# Altium PCB ESP32 with USBC V1I1.PcbDoc (part 2 of 3)
Units mil, origin at the board's own origin, x right, y up, seen from the top; angles counter-clockwise.
Board outline 2700 x 1000 mil, 4 copper layers (L1, L2, L3, L4), stack 61.583 mil thick; 64 components, 73 nets, 299 pads, 159 vias.
Unrouted connection lines stored in the file: 15.
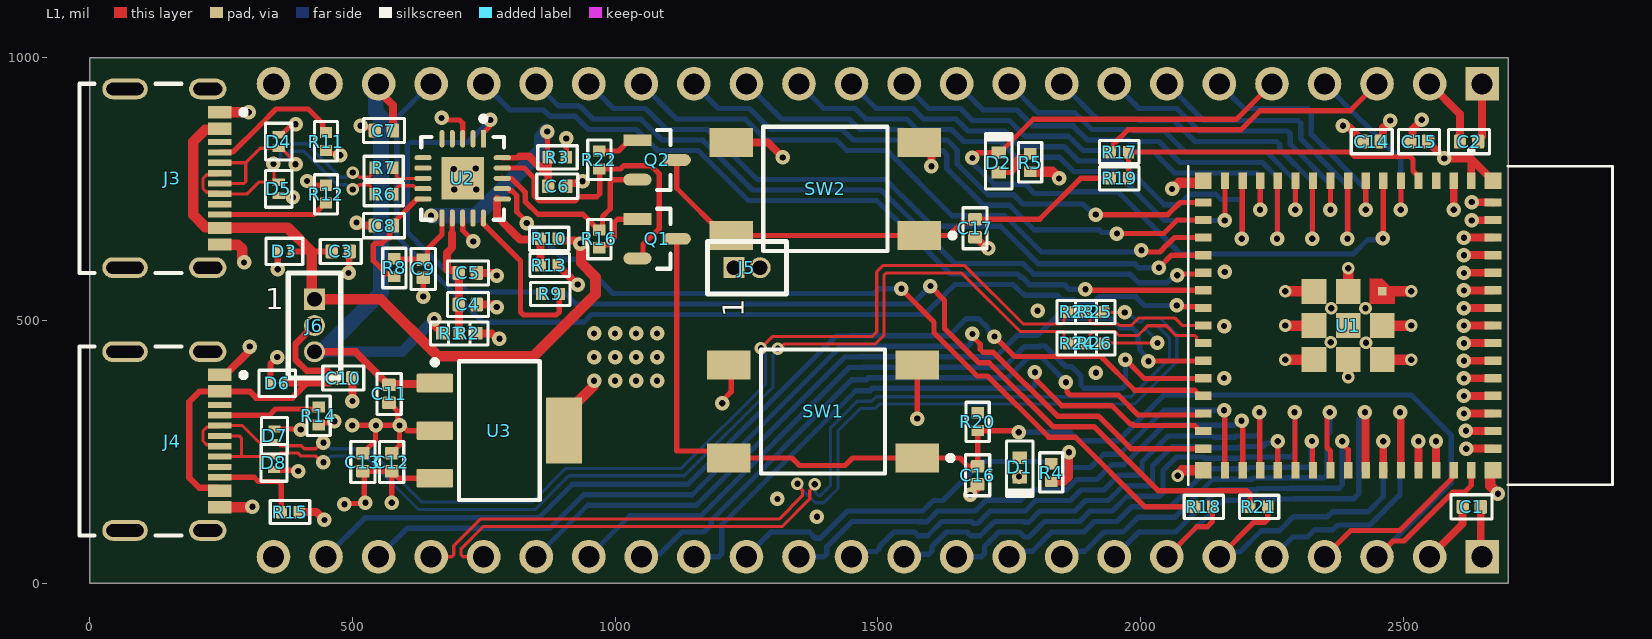
[diagram p0: L1 view]

## Part data (continued)
R4 R5: library part RC0402FR-071KL, "RES 1K OHM 1% 1/16W 0402", Case Code (Imperial)=0402, LCSC Part Number=C106235, Manufacturer="Yageo Group", Max Operating Temperature=155°C, Min Operating Temperature=-55°C, Power Dissipation=62.5mW, Power Rating=63mW, Supplier Part Number=311-1.00KLRCT-ND, Temperature Coefficient=100ppm/°C, Tolerance=1%, Voltage Rating=50V, Case Code (Metric)=0402, Case/Package=0402, Category="Chip SMD Resistors", China RoHS=Non-Compliant, ComponentLink1Description=https://datasheet.octopart.com:443/RC0402FR-071KL-Yageo-datasheet-175887523.pdf?src-supplier=IHS, ComponentLink1URL=https://datasheet.octopart.com:443/RC0402FR-071KL-Yageo-datasheet-175887523.pdf?src-supplier=IHS, ComponentLink2Description=https://datasheet.octopart.com:443/RC0402FR-071KL-Yageo-datasheet-164759695.pdf?src-supplier=Upverter, ComponentLink2URL=https://datasheet.octopart.com:443/RC0402FR-071KL-Yageo-datasheet-164759695.pdf?src-supplier=Upverter, ComponentLink3Description=https://datasheet.octopart.com:443/RC0402FR-071KL-Yageo-datasheet-103092701.pdf?src-supplier=Upverter, ComponentLink3URL=https://datasheet.octopart.com:443/RC0402FR-071KL-Yageo-datasheet-103092701.pdf?src-supplier=Upverter, ComponentLink4Description=https://sigma.octopart.com:443/138820526/technical_drawing/Yageo-RC0402FR-071KL.pdf?src-supplier=Upverter, ComponentLink4URL=https://sigma.octopart.com:443/138820526/technical_drawing/Yageo-RC0402FR-071KL.pdf?src-supplier=Upverter, ComponentLink5Description=https://datasheet.octopart.com:443/RC0402FR-071KL-Yageo-datasheet-98239111.pdf?src-supplier=Upverter, ComponentLink5URL=https://datasheet.octopart.com:443/RC0402FR-071KL-Yageo-datasheet-98239111.pdf?src-supplier=Upverter, ComponentLink6Description=https://datasheet.octopart.com:443/RC0402FR-071KL-Yageo-datasheet-10408619.pdf?src-supplier=Newark, ComponentLink6URL=https://datasheet.octopart.com:443/RC0402FR-071KL-Yageo-datasheet-10408619.pdf?src-supplier=Newark, ComponentLink7Description=https://datasheet.octopart.com:443/RC0402FR-071KL-Yageo-datasheet-8324527.pdf?src-supplier=Newark, ComponentLink7URL=https://datasheet.octopart.com:443/RC0402FR-071KL-Yageo-datasheet-8324527.pdf?src-supplier=Newark, ComponentLink8Description=https://datasheet.octopart.com:443/RC0402FR-071KL-Yageo-datasheet-62067350.pdf?src-supplier=Farnell, ComponentLink8URL=https://datasheet.octopart.com:443/RC0402FR-071KL-Yageo-datasheet-62067350.pdf?src-supplier=Farnell, ComponentLink9Description=https://datasheet.octopart.com:443/RC0402FR-071KL-Yageo-datasheet-12531192.pdf?src-supplier=Future+Electronics, ComponentLink9URL=https://datasheet.octopart.com:443/RC0402FR-071KL-Yageo-datasheet-12531192.pdf?src-supplier=Future+Electronics, ComponentLink10Description=https://datasheet.octopart.com:443/RC0402FR-071KL-Yageo-datasheet-137700087.pdf?src-supplier=Future+Electronics, ComponentLink10URL=https://datasheet.octopart.com:443/RC0402FR-071KL-Yageo-datasheet-137700087.pdf?src-supplier=Future+Electronics, ComponentLink11Description=https://datasheet.octopart.com:443/RC0402FR-071KL-Yageo-datasheet-8324255.pdf?src-supplier=Future+Electronics, ComponentLink11URL=https://datasheet.octopart.com:443/RC0402FR-071KL-Yageo-datasheet-8324255.pdf?src-supplier=Future+Electronics, ComponentLink12Description=https://datasheet.octopart.com:443/RC0402FR-071KL-Yageo-datasheet-8329306.pdf?src-supplier=element14, ComponentLink12URL=https://datasheet.octopart.com:443/RC0402FR-071KL-Yageo-datasheet-8329306.pdf?src-supplier=element14, ComponentLink13Description=https://datasheet.octopart.com:443/RC0402FR-071KL-Yageo-datasheet-505231.pdf?src-supplier=element14, ComponentLink13URL=https://datasheet.octopart.com:443/RC0402FR-071KL-Yageo-datasheet-505231.pdf?src-supplier=element14, ComponentLink14Description=https://datasheet.octopart.com:443/RC0402FR-071KL-Yageo-datasheet-175423674.pdf?src-supplier=SOS+electronic, ComponentLink14URL=https://datasheet.octopart.com:443/RC0402FR-071KL-Yageo-datasheet-175423674.pdf?src-supplier=SOS+electronic, ComponentLink15Description=https://datasheet.octopart.com:443/RC0402FR-071KL-Yageo-datasheet-148775077.pdf?src-supplier=TME, ComponentLink15URL=https://datasheet.octopart.com:443/RC0402FR-071KL-Yageo-datasheet-148775077.pdf?src-supplier=TME, ComponentLink16Description=https://datasheet.octopart.com:443/RC0402FR-071KL-Yageo-datasheet-79472498.pdf?src-supplier=Megastar, ComponentLink16URL=https://datasheet.octopart.com:443/RC0402FR-071KL-Yageo-datasheet-79472498.pdf?src-supplier=Megastar, ComponentLink17Description=https://datasheet.octopart.com/RC0402FR-071KL-Yageo-datasheet-73766026.pdf, ComponentLink17URL=https://datasheet.octopart.com/RC0402FR-071KL-Yageo-datasheet-73766026.pdf, ComponentLink18Description=http://sigma.octopart.com:80/conflict_mineral_statement/Yageo-company-3.pdf?src-supplier=Compliance+Statements, ComponentLink18URL=http://sigma.octopart.com:80/conflict_mineral_statement/Yageo-company-3.pdf?src-supplier=Compliance+Statements, ComponentLink19Description=http://sigma.octopart.com:80/rohs_statement/Yageo-company-2.pdf?src-supplier=Compliance+Statements, ComponentLink19URL=http://sigma.octopart.com:80/rohs_statement/Yageo-company-2.pdf?src-supplier=Compliance+Statements, Composition="Thick Film", Depth=500µm, Height=350µm, Lead Free="Lead Free", Length=1mm, Lifecycle Status=Production, Manufacturer Part Number=RC0402FR-071KL, Military Standard=Not, Mounting Technology="Surface Mount", Number of Terminals=2, Packaging="Tape & Reel", Pins=2, Pricing="1=0.1, 10=0.007, 25=0.0068, 50=0.0062, 100=0.0056, 250=0.00308 (USD)", REACH SVHC=Yes, RoHS=Compliant, Schedule B="8533210045, 8533210045|8533210045|8533210045|8533210045|8533210045|8533210045|8533210045|8533210045|8533210045|8533210045|8533210045|8533210045|8533210045|8533210045|8533210045|8533210045|8533210045|8533210045|8533210045|8533210045|8533210045|8533210045|8533210045|85", Stock=2177165, Supplier=DigiKey, Termination=SMD/SMT, Voltage Rating (AC)=50V, Voltage Rating (DC)=50V, Width=500µm, Working Voltage=50V
R6 R7 R17 R19: library part RC0402FR-0727RL, "RES 27 OHM 1% 1/16W 0402", Case Code (Imperial)=0402, Case Code (Metric)=1005, LCSC Part Number=C138021, Manufacturer="Yageo Group", Max Operating Temperature=155°C, Max Power Dissipation=63mW, Min Operating Temperature=-55°C, Power Dissipation=62.5mW, Supplier Part Number=YAG3086CT-ND, Temperature Coefficient=100ppm/°C, Tolerance=1%, Voltage Rating=50V, Case/Package=0402, Category="Chip SMD Resistors", China RoHS=Non-Compliant, ComponentLink1Description=https://datasheet.octopart.com:443/RC0402FR-0727RL-Yageo-datasheet-175887523.pdf?src-supplier=Newark, ComponentLink1URL=https://datasheet.octopart.com:443/RC0402FR-0727RL-Yageo-datasheet-175887523.pdf?src-supplier=Newark, ComponentLink2Description=https://datasheet.octopart.com:443/RC0402FR-0727RL-Yageo-datasheet-8324527.pdf?src-supplier=Newark, ComponentLink2URL=https://datasheet.octopart.com:443/RC0402FR-0727RL-Yageo-datasheet-8324527.pdf?src-supplier=Newark, ComponentLink3Description=https://datasheet.octopart.com:443/RC0402FR-0727RL-Yageo-datasheet-103092701.pdf?src-supplier=Upverter, ComponentLink3URL=https://datasheet.octopart.com:443/RC0402FR-0727RL-Yageo-datasheet-103092701.pdf?src-supplier=Upverter, ComponentLink4Description=https://datasheet.octopart.com:443/RC0402FR-0727RL-Yageo-datasheet-10408619.pdf?src-supplier=element14+APAC, ComponentLink4URL=https://datasheet.octopart.com:443/RC0402FR-0727RL-Yageo-datasheet-10408619.pdf?src-supplier=element14+APAC, ComponentLink5Description=https://datasheet.octopart.com:443/RC0402FR-0727RL-Yageo-datasheet-62067350.pdf?src-supplier=element14+APAC, ComponentLink5URL=https://datasheet.octopart.com:443/RC0402FR-0727RL-Yageo-datasheet-62067350.pdf?src-supplier=element14+APAC, ComponentLink6Description=https://datasheet.octopart.com:443/RC0402FR-0727RL-Yageo-datasheet-175423674.pdf?src-supplier=SOS+electronic, ComponentLink6URL=https://datasheet.octopart.com:443/RC0402FR-0727RL-Yageo-datasheet-175423674.pdf?src-supplier=SOS+electronic, ComponentLink7Description=https://datasheet.octopart.com:443/RC0402FR-0727RL-Yageo-datasheet-8329306.pdf?src-supplier=SOS+electronic, ComponentLink7URL=https://datasheet.octopart.com:443/RC0402FR-0727RL-Yageo-datasheet-8329306.pdf?src-supplier=SOS+electronic, ComponentLink8Description=https://datasheet.octopart.com:443/RC0402FR-0727RL-Yageo-datasheet-164759695.pdf?src-supplier=Future+Electronics, ComponentLink8URL=https://datasheet.octopart.com:443/RC0402FR-0727RL-Yageo-datasheet-164759695.pdf?src-supplier=Future+Electronics, ComponentLink9Description=https://datasheet.octopart.com:443/RC0402FR-0727RL-Yageo-datasheet-137700087.pdf?src-supplier=Future+Electronics, ComponentLink9URL=https://datasheet.octopart.com:443/RC0402FR-0727RL-Yageo-datasheet-137700087.pdf?src-supplier=Future+Electronics, ComponentLink10Description=https://datasheet.octopart.com:443/RC0402FR-0727RL-Yageo-datasheet-12531192.pdf?src-supplier=Future+Electronics, ComponentLink10URL=https://datasheet.octopart.com:443/RC0402FR-0727RL-Yageo-datasheet-12531192.pdf?src-supplier=Future+Electronics, ComponentLink11Description=https://datasheet.octopart.com:443/RC0402FR-0727RL-Yageo-datasheet-148775077.pdf?src-supplier=TME, ComponentLink11URL=https://datasheet.octopart.com:443/RC0402FR-0727RL-Yageo-datasheet-148775077.pdf?src-supplier=TME, ComponentLink12Description=https://datasheet.octopart.com/RC0402FR-0727RL-Yageo-datasheet-73766026.pdf, ComponentLink12URL=https://datasheet.octopart.com/RC0402FR-0727RL-Yageo-datasheet-73766026.pdf, ComponentLink13Description=http://sigma.octopart.com:80/conflict_mineral_statement/Yageo-company-3.pdf?src-supplier=Compliance+Statements, ComponentLink13URL=http://sigma.octopart.com:80/conflict_mineral_statement/Yageo-company-3.pdf?src-supplier=Compliance+Statements, ComponentLink14Description=http://sigma.octopart.com:80/rohs_statement/Yageo-company-2.pdf?src-supplier=Compliance+Statements, ComponentLink14URL=http://sigma.octopart.com:80/rohs_statement/Yageo-company-2.pdf?src-supplier=Compliance+Statements, Composition="Thick Film", Depth=500µm, Features="Moisture Resistant", Height=350µm, Lead Free="Lead Free", Length=1mm, Lifecycle Status=Production, Manufacturer Part Number=RC0402FR-0727RL, Military Standard=Not, Mounting Technology="Surface Mount", Number of Terminals=2, Number of Terminations=2, Pins=2, Power Rating=63mW, Pricing="1=0.1, 10=0.007, 25=0.0068, 50=0.0062, 100=0.0051, 250=0.00308 (USD)", REACH SVHC=Yes, RoHS=Compliant, Schedule B="8533210045, 8533210045|8533210045, 8533210045|8533210045|8533210045, 8533210045|8533210045|8533210045|8533210045", Stock=411299, Supplier=DigiKey, Termination=SMD/SMT, Voltage Rating (AC)=50V, Voltage Rating (DC)=50V, Weight=652.039032µg, Width=500µm, Working Voltage=50V
R9 R13 R16 R20 R22: library part AC0402FR-0710KL, "RES SMD 10K OHM 1% 1/16W 0402", Case Code (Imperial)=0402, Case Code (Metric)=1005, LCSC Part Number=C144807, Manufacturer="Yageo Group", Max Operating Temperature=155°C, Max Power Dissipation=63mW, Min Operating Temperature=-55°C, Power Dissipation=62.5mW, Supplier Part Number=YAG3436CT-ND, Temperature Coefficient=100ppm/°C, Tolerance=1%, Voltage Rating=50V, Case/Package=0402, Category="Chip SMD Resistors", China RoHS=Non-Compliant, ComponentLink1Description=https://datasheet.octopart.com:443/AC0402FR-0710KL-Yageo-datasheet-182189377.pdf?src-supplier=IHS, ComponentLink1URL=https://datasheet.octopart.com:443/AC0402FR-0710KL-Yageo-datasheet-182189377.pdf?src-supplier=IHS, ComponentLink2Description=https://datasheet.octopart.com:443/AC0402FR-0710KL-Yageo-datasheet-83209224.pdf?src-supplier=Upverter, ComponentLink2URL=https://datasheet.octopart.com:443/AC0402FR-0710KL-Yageo-datasheet-83209224.pdf?src-supplier=Upverter, ComponentLink3Description=https://datasheet.octopart.com:443/AC0402FR-0710KL-Yageo-datasheet-178509465.pdf?src-supplier=Newark, ComponentLink3URL=https://datasheet.octopart.com:443/AC0402FR-0710KL-Yageo-datasheet-178509465.pdf?src-supplier=Newark, ComponentLink4Description=https://datasheet.octopart.com:443/AC0402FR-0710KL-Yageo-datasheet-166720450.pdf?src-supplier=JRH+Electronics, ComponentLink4URL=https://datasheet.octopart.com:443/AC0402FR-0710KL-Yageo-datasheet-166720450.pdf?src-supplier=JRH+Electronics, ComponentLink5Description=https://datasheet.octopart.com:443/AC0402FR-0710KL-Yageo-datasheet-151884373.pdf?src-supplier=Future+Electronics, ComponentLink5URL=https://datasheet.octopart.com:443/AC0402FR-0710KL-Yageo-datasheet-151884373.pdf?src-supplier=Future+Electronics, ComponentLink6Description=https://datasheet.octopart.com:443/AC0402FR-0710KL-Yageo-datasheet-137699919.pdf?src-supplier=Future+Electronics, ComponentLink6URL=https://datasheet.octopart.com:443/AC0402FR-0710KL-Yageo-datasheet-137699919.pdf?src-supplier=Future+Electronics, ComponentLink7Description=https://datasheet.octopart.com:443/AC0402FR-0710KL-Yageo-datasheet-24580492.pdf?src-supplier=Future+Electronics, ComponentLink7URL=https://datasheet.octopart.com:443/AC0402FR-0710KL-Yageo-datasheet-24580492.pdf?src-supplier=Future+Electronics, ComponentLink8Description=https://datasheet.octopart.com:443/AC0402FR-0710KL-Yageo-datasheet-13029202.pdf?src-supplier=Future+Electronics, ComponentLink8URL=https://datasheet.octopart.com:443/AC0402FR-0710KL-Yageo-datasheet-13029202.pdf?src-supplier=Future+Electronics, ComponentLink9Description=https://datasheet.octopart.com/AC0402FR-0710KL-Yageo-datasheet-12512238.pdf, ComponentLink9URL=https://datasheet.octopart.com/AC0402FR-0710KL-Yageo-datasheet-12512238.pdf, ComponentLink10Description=https://datasheet.octopart.com:443/AC0402FR-0710KL-Yageo-Group-datasheet-164768995.pdf?src-supplier=ODG+(Origin+Data+Global), ComponentLink10URL=https://datasheet.octopart.com:443/AC0402FR-0710KL-Yageo-Group-datasheet-164768995.pdf?src-supplier=ODG+(Origin+Data+Global), ComponentLink11Description=https://datasheet.octopart.com:443/AC0402FR-0710KL-Yageo-datasheet-128677448.pdf?src-supplier=X-ON, ComponentLink11URL=https://datasheet.octopart.com:443/AC0402FR-0710KL-Yageo-datasheet-128677448.pdf?src-supplier=X-ON, ComponentLink12Description=http://sigma.octopart.com:80/conflict_mineral_statement/Yageo-company-3.pdf?src-supplier=Compliance+Statements, ComponentLink12URL=http://sigma.octopart.com:80/conflict_mineral_statement/Yageo-company-3.pdf?src-supplier=Compliance+Statements, ComponentLink13Description=http://sigma.octopart.com:80/rohs_statement/Yageo-company-2.pdf?src-supplier=Compliance+Statements, ComponentLink13URL=http://sigma.octopart.com:80/rohs_statement/Yageo-company-2.pdf?src-supplier=Compliance+Statements, Composition="Thick Film", Depth=500µm, Features="Automotive AEC-Q200, Moisture Resistant", Height=320µm, Lead Free="Lead Free", Length=990.6µm, Lifecycle Status=Production, Manufacturer Part Number=AC0402FR-0710KL, Military Standard=Not, Mounting Technology="Surface Mount", Number of Terminals=2, Number of Terminations=2, Packaging="Tape & Reel", Power Rating=62.5mW, Pricing="1=0.11, 10=0.008, 25=0.0076, 50=0.0068, 100=0.0058, 5000=0.00407 (USD)", REACH SVHC=Yes, RoHS=Compliant, Schedule B="8533210045, 8533210045|8533210045|8533210045|8533210045|8533210045|8533210045|8533210045|8533210045|8533210045|8533210045|8533210045|8533210045|8533210045|8533210045|8533210045|8533210045|8533210045|8533210045|8533210045, 8533210045|8533210045|8533210045|8533210045|8533210045|8533210045|8533210045|8533210045|8533210045|8533210045|8533210045|8533210045|8533210045|8533210045|8533210045|8533210045|8533210045|8533210045|8533210045|8533210045|8533210045|8533210045|8533210045|85", Stock=3640210, Supplier=DigiKey, Termination=SMD/SMT, Width=500µm, Working Voltage=50V
R10: library part RC0402FR-074K7L, "RES 4.7K OHM 1% 1/16W 0402", Case Code (Imperial)=0402, Case Code (Metric)=1005, LCSC Part Number=C105871, Manufacturer="Yageo Group", Max Operating Temperature=155°C, Min Operating Temperature=-55°C, Power Dissipation=62.5mW, Power Rating=63mW, Supplier Part Number=311-4.7KLRDKR-ND, Temperature Coefficient=100ppm/°C, Tolerance=1%, Voltage Rating=50V, Case/Package=0402, Category="Chip SMD Resistors", China RoHS=Non-Compliant, ComponentLink1Description=https://datasheet.octopart.com:443/RC0402FR-074K7L-Yageo-datasheet-175887523.pdf?src-supplier=IHS, ComponentLink1URL=https://datasheet.octopart.com:443/RC0402FR-074K7L-Yageo-datasheet-175887523.pdf?src-supplier=IHS, ComponentLink2Description=https://datasheet.octopart.com:443/RC0402FR-074K7L-Yageo-datasheet-103092701.pdf?src-supplier=Upverter, ComponentLink2URL=https://datasheet.octopart.com:443/RC0402FR-074K7L-Yageo-datasheet-103092701.pdf?src-supplier=Upverter, ComponentLink3Description=https://datasheet.octopart.com:443/RC0402FR-074K7L-Yageo-datasheet-98239111.pdf?src-supplier=Upverter, ComponentLink3URL=https://datasheet.octopart.com:443/RC0402FR-074K7L-Yageo-datasheet-98239111.pdf?src-supplier=Upverter, ComponentLink4Description=https://datasheet.octopart.com:443/RC0402FR-074K7L-Yageo-Group-datasheet-190051977.pdf?src-supplier=Newark, ComponentLink4URL=https://datasheet.octopart.com:443/RC0402FR-074K7L-Yageo-Group-datasheet-190051977.pdf?src-supplier=Newark, ComponentLink5Description=https://datasheet.octopart.com:443/RC0402FR-074K7L-Yageo-datasheet-12531192.pdf?src-supplier=Newark, ComponentLink5URL=https://datasheet.octopart.com:443/RC0402FR-074K7L-Yageo-datasheet-12531192.pdf?src-supplier=Newark, ComponentLink6Description=https://datasheet.octopart.com:443/RC0402FR-074K7L-Yageo-datasheet-8324527.pdf?src-supplier=Newark, ComponentLink6URL=https://datasheet.octopart.com:443/RC0402FR-074K7L-Yageo-datasheet-8324527.pdf?src-supplier=Newark, ComponentLink7Description=https://datasheet.octopart.com:443/RC0402FR-074K7L-Yageo-datasheet-10408619.pdf?src-supplier=element14+APAC, ComponentLink7URL=https://datasheet.octopart.com:443/RC0402FR-074K7L-Yageo-datasheet-10408619.pdf?src-supplier=element14+APAC, ComponentLink8Description=https://datasheet.octopart.com:443/RC0402FR-074K7L-Yageo-datasheet-13691069.pdf?src-supplier=element14+APAC, ComponentLink8URL=https://datasheet.octopart.com:443/RC0402FR-074K7L-Yageo-datasheet-13691069.pdf?src-supplier=element14+APAC, ComponentLink9Description=https://datasheet.octopart.com:443/RC0402FR-074K7L-Yageo-datasheet-62067350.pdf?src-supplier=Farnell, ComponentLink9URL=https://datasheet.octopart.com:443/RC0402FR-074K7L-Yageo-datasheet-62067350.pdf?src-supplier=Farnell, ComponentLink10Description=https://datasheet.octopart.com:443/RC0402FR-074K7L-Yageo-datasheet-8329306.pdf?src-supplier=element14, ComponentLink10URL=https://datasheet.octopart.com:443/RC0402FR-074K7L-Yageo-datasheet-8329306.pdf?src-supplier=element14, ComponentLink11Description=https://datasheet.octopart.com:443/RC0402FR-074K7L-Yageo-datasheet-175423674.pdf?src-supplier=SOS+electronic, ComponentLink11URL=https://datasheet.octopart.com:443/RC0402FR-074K7L-Yageo-datasheet-175423674.pdf?src-supplier=SOS+electronic, ComponentLink12Description=https://datasheet.octopart.com:443/RC0402FR-074K7L-Yageo-datasheet-164759695.pdf?src-supplier=Future+Electronics, ComponentLink12URL=https://datasheet.octopart.com:443/RC0402FR-074K7L-Yageo-datasheet-164759695.pdf?src-supplier=Future+Electronics, ComponentLink13Description=https://datasheet.octopart.com:443/RC0402FR-074K7L-Yageo-datasheet-137700087.pdf?src-supplier=Future+Electronics, ComponentLink13URL=https://datasheet.octopart.com:443/RC0402FR-074K7L-Yageo-datasheet-137700087.pdf?src-supplier=Future+Electronics, ComponentLink14Description=https://datasheet.octopart.com:443/RC0402FR-074K7L-Yageo-datasheet-79472498.pdf?src-supplier=Megastar, ComponentLink14URL=https://datasheet.octopart.com:443/RC0402FR-074K7L-Yageo-datasheet-79472498.pdf?src-supplier=Megastar, ComponentLink15Description=https://datasheet.octopart.com/RC0402FR-074K7L-Yageo-datasheet-73766026.pdf, ComponentLink15URL=https://datasheet.octopart.com/RC0402FR-074K7L-Yageo-datasheet-73766026.pdf, ComponentLink16Description=http://sigma.octopart.com:80/conflict_mineral_statement/Yageo-company-3.pdf?src-supplier=Compliance+Statements, ComponentLink16URL=http://sigma.octopart.com:80/conflict_mineral_statement/Yageo-company-3.pdf?src-supplier=Compliance+Statements, ComponentLink17Description=http://sigma.octopart.com:80/rohs_statement/Yageo-company-2.pdf?src-supplier=Compliance+Statements, ComponentLink17URL=http://sigma.octopart.com:80/rohs_statement/Yageo-company-2.pdf?src-supplier=Compliance+Statements, Composition="Thick Film", Depth=500µm, Height=350µm, Lead Free="Lead Free", Length=1mm, Lifecycle Status=Production, Manufacturer Part Number=RC0402FR-074K7L, Military Standard=Not, Mounting Technology="Surface Mount", Number of Terminals=2, Packaging="Tape & Reel", Pins=2, Pricing="1=0.1, 10=0.010, 25=0.008, 50=0.0062, 100=0.0056, 250=0.00508, 500=0.00408 (USD)", REACH SVHC=Yes, RoHS=Compliant, Schedule B="8533210045, 8533210045|8533210045, 8533210045|8533210045|8533210045, 8533210045|8533210045|8533210045|8533210045", Stock=6036940, Supplier=DigiKey, Termination=SMD/SMT, Voltage Rating (AC)=50V, Voltage Rating (DC)=50V, Width=500µm, Working Voltage=50V
R11 R12 R14 R15: library part AC0402FR-075K1L, "Res Thick Film 0402 5.1K Ohm 1% 0.063W(1/16W) ±100ppm/C Pad SMD Automotive T/R", Case Code (Imperial)=0402, Case Code (Metric)=1005, LCSC Part Number=C144745, Manufacturer="Yageo Group", Max Operating Temperature=155°C, Max Power Dissipation=63mW, Min Operating Temperature=-55°C, Power Dissipation=62.5mW, Supplier Part Number=YAG3503CT-ND, Temperature Coefficient=100ppm/°C, Tolerance=1%, Voltage Rating=50V, Case/Package=0402, Category="Chip SMD Resistors", China RoHS=Non-Compliant, ComponentLink1Description=https://datasheet.octopart.com:443/AC0402FR-075K1L-Yageo-datasheet-182189377.pdf?src-supplier=IHS, ComponentLink1URL=https://datasheet.octopart.com:443/AC0402FR-075K1L-Yageo-datasheet-182189377.pdf?src-supplier=IHS, ComponentLink2Description=https://datasheet.octopart.com:443/AC0402FR-075K1L-Yageo-datasheet-83209224.pdf?src-supplier=Upverter, ComponentLink2URL=https://datasheet.octopart.com:443/AC0402FR-075K1L-Yageo-datasheet-83209224.pdf?src-supplier=Upverter, ComponentLink3Description=https://datasheet.octopart.com:443/AC0402FR-075K1L-Yageo-datasheet-178509465.pdf?src-supplier=Newark, ComponentLink3URL=https://datasheet.octopart.com:443/AC0402FR-075K1L-Yageo-datasheet-178509465.pdf?src-supplier=Newark, ComponentLink4Description=https://datasheet.octopart.com/AC0402FR-075K1L-Yageo-datasheet-12512238.pdf, ComponentLink4URL=https://datasheet.octopart.com/AC0402FR-075K1L-Yageo-datasheet-12512238.pdf, ComponentLink5Description=https://datasheet.octopart.com:443/AC0402FR-075K1L-Yageo-datasheet-166720450.pdf?src-supplier=Future+Electronics, ComponentLink5URL=https://datasheet.octopart.com:443/AC0402FR-075K1L-Yageo-datasheet-166720450.pdf?src-supplier=Future+Electronics, ComponentLink6Description=https://datasheet.octopart.com:443/AC0402FR-075K1L-Yageo-datasheet-151884373.pdf?src-supplier=Future+Electronics, ComponentLink6URL=https://datasheet.octopart.com:443/AC0402FR-075K1L-Yageo-datasheet-151884373.pdf?src-supplier=Future+Electronics, ComponentLink7Description=https://datasheet.octopart.com:443/AC0402FR-075K1L-Yageo-datasheet-137699919.pdf?src-supplier=Future+Electronics, ComponentLink7URL=https://datasheet.octopart.com:443/AC0402FR-075K1L-Yageo-datasheet-137699919.pdf?src-supplier=Future+Electronics, ComponentLink8Description=https://datasheet.octopart.com:443/AC0402FR-075K1L-Yageo-datasheet-24580492.pdf?src-supplier=Future+Electronics, ComponentLink8URL=https://datasheet.octopart.com:443/AC0402FR-075K1L-Yageo-datasheet-24580492.pdf?src-supplier=Future+Electronics, ComponentLink9Description=https://datasheet.octopart.com:443/AC0402FR-075K1L-Yageo-datasheet-13029202.pdf?src-supplier=Future+Electronics, ComponentLink9URL=https://datasheet.octopart.com:443/AC0402FR-075K1L-Yageo-datasheet-13029202.pdf?src-supplier=Future+Electronics, ComponentLink10Description=https://datasheet.octopart.com:443/AC0402FR-075K1L-Yageo-Group-datasheet-164768995.pdf?src-supplier=ODG+(Origin+Data+Global), ComponentLink10URL=https://datasheet.octopart.com:443/AC0402FR-075K1L-Yageo-Group-datasheet-164768995.pdf?src-supplier=ODG+(Origin+Data+Global), ComponentLink11Description=http://sigma.octopart.com:80/conflict_mineral_statement/Yageo-company-3.pdf?src-supplier=Compliance+Statements, ComponentLink11URL=http://sigma.octopart.com:80/conflict_mineral_statement/Yageo-company-3.pdf?src-supplier=Compliance+Statements, ComponentLink12Description=http://sigma.octopart.com:80/rohs_statement/Yageo-company-2.pdf?src-supplier=Compliance+Statements, ComponentLink12URL=http://sigma.octopart.com:80/rohs_statement/Yageo-company-2.pdf?src-supplier=Compliance+Statements, Composition="Thick Film", Depth=500µm, Features="Automotive AEC-Q200, Moisture Resistant", Height=320µm, Lead Free="Lead Free", Length=990.6µm, Lifecycle Status=Production, Manufacturer Part Number=AC0402FR-075K1L, Military Standard=Not, Mounting Technology="Surface Mount", Number of Terminals=2, Number of Terminations=2, Power Rating=62.5mW, Pricing="1=0.1, 10=0.009, 25=0.008, 50=0.0072, 100=0.0066, 250=0.00576, 500=0.00406 (USD)", REACH SVHC=Yes, RoHS=Compliant, Schedule B="8533210045, 8533210045|8533210045|8533210045|8533210045|8533210045|8533210045|8533210045|8533210045|8533210045|8533210045|8533210045|8533210045|8533210045|8533210045|8533210045|8533210045|8533210045|8533210045|8533210045|8533210045|8533210045|8533210045|8533210045|85", Stock=6681, Supplier=DigiKey, Width=500µm, Working Voltage=50V
SW1 SW2: "Switch Tactile N.O. SPST Round Button Gull Wing 0.05A 12VDC 100000Cycles 2.55N SMD T/R", Color=Beige, Contact Resistance=100mΩ, Current Rating=50mA, Insulation Resistance=100MΩ, Manufacturer=E-Switch, Max Operating Temperature=70°C, Max Voltage Rating (DC)=12V, Min Operating Temperature=-40°C, Operating Force=2.55N, Supplier Part Number=EG2527CT-ND, Actuator Length=1.4mm, Actuator Material="Nylon, Polyamide", Category="Tactile Switches", ComponentLink1Description=https://datasheet.octopart.com:443/TL3301AF260QG-E-Switch-datasheet-165859977.pdf?src-supplier=Future+Electronics, ComponentLink1URL=https://datasheet.octopart.com:443/TL3301AF260QG-E-Switch-datasheet-165859977.pdf?src-supplier=Future+Electronics, ComponentLink2Description=https://datasheet.octopart.com:443/TL3301AF260QG-E-Switch-datasheet-32479546.pdf?src-supplier=Future+Electronics, ComponentLink2URL=https://datasheet.octopart.com:443/TL3301AF260QG-E-Switch-datasheet-32479546.pdf?src-supplier=Future+Electronics, ComponentLink3Description=https://datasheet.octopart.com:443/TL3301AF260QG-E-Switch-datasheet-26831008.pdf?src-supplier=Future+Electronics, ComponentLink3URL=https://datasheet.octopart.com:443/TL3301AF260QG-E-Switch-datasheet-26831008.pdf?src-supplier=Future+Electronics, ComponentLink4Description=https://datasheet.octopart.com:443/TL3301AF260QG-E-Switch-datasheet-8331992.pdf?src-supplier=Future+Electronics, ComponentLink4URL=https://datasheet.octopart.com:443/TL3301AF260QG-E-Switch-datasheet-8331992.pdf?src-supplier=Future+Electronics, ComponentLink5Description=https://datasheet.octopart.com:443/TL3301AF260QG-E-Switch-datasheet-500121.pdf?src-supplier=Farnell, ComponentLink5URL=https://datasheet.octopart.com:443/TL3301AF260QG-E-Switch-datasheet-500121.pdf?src-supplier=Farnell, ComponentLink6Description=https://datasheet.octopart.com:443/TL3301AF260QG-E-Switch-datasheet-100437263.pdf?src-supplier=Farnell, ComponentLink6URL=https://datasheet.octopart.com:443/TL3301AF260QG-E-Switch-datasheet-100437263.pdf?src-supplier=Farnell, ComponentLink7Description=https://datasheet.octopart.com:443/TL3301AF260QG-E-Switch-datasheet-140258799.pdf?src-supplier=LKR, ComponentLink7URL=https://datasheet.octopart.com:443/TL3301AF260QG-E-Switch-datasheet-140258799.pdf?src-supplier=LKR, ComponentLink8Description=https://datasheet.octopart.com:443/TL3301AF260QG-E-Switch-datasheet-27847350.pdf?src-supplier=Master+Electronics, ComponentLink8URL=https://datasheet.octopart.com:443/TL3301AF260QG-E-Switch-datasheet-27847350.pdf?src-supplier=Master+Electronics, ComponentLink9Description=https://datasheet.octopart.com:443/TL3301AF260QG-E-Switch-datasheet-155463340.pdf?src-supplier=TME, ComponentLink9URL=https://datasheet.octopart.com:443/TL3301AF260QG-E-Switch-datasheet-155463340.pdf?src-supplier=TME, Contact Material=Silver, Contact Plating=Silver, Electrical Life=100kcycles, Height=3.6mm, Housing Material=Nylon, Illumination Type="Illuminated, Non-Illuminated", Lead Free="Lead Free", Length=6mm, Lifecycle Status=Production, Manufacturer Part Number=TL3301AF260QG, Max Current Rating=50mA, Mechanical Life=100kcycles, Mounting Technology="Surface Mount", Number of Positions=1, Orientation=Straight, Pricing="1=0.34, 10=0.297, 25=0.2772, 100=0.2483, 250=0.23012, 500=0.21718 (USD)", REACH SVHC=Yes, RoHS=Compliant, Stock=51747, Supplier=DigiKey, Switch Function=Off-Mom, Switch Travel=250µm, Termination="Gull Wing", Throw Configuration=SPST, Voltage Rating (DC)=12V
U1: "20.5dBm ESP32-S3FN8 Chip 2.4GHz SMD WiFi Modules ROHS", LCSC Part Number=C2913206, Manufacturer="Espressif Systems", Supplier Part Number=5407-ESP32-S3-MINI-1-N8CT-ND, Category="RF Transceiver Modules and Modems", ComponentLink1Description=https://datasheet.octopart.com:443/ESP32-S3-MINI-1-N8-Espressif-Systems-datasheet-188867343.pdf?src-supplier=TME, ComponentLink1URL=https://datasheet.octopart.com:443/ESP32-S3-MINI-1-N8-Espressif-Systems-datasheet-188867343.pdf?src-supplier=TME, ComponentLink2Description=https://datasheet.octopart.com:443/ESP32-S3-MINI-1-N8-Espressif-Systems-datasheet-165560562.pdf?src-supplier=TME, ComponentLink2URL=https://datasheet.octopart.com:443/ESP32-S3-MINI-1-N8-Espressif-Systems-datasheet-165560562.pdf?src-supplier=TME, ComponentLink3Description=https://datasheet.octopart.com:443/ESP32-S3-MINI-1-N8-Espressif-Systems-datasheet-165560559.pdf?src-supplier=TME, ComponentLink3URL=https://datasheet.octopart.com:443/ESP32-S3-MINI-1-N8-Espressif-Systems-datasheet-165560559.pdf?src-supplier=TME, Manufacturer Part Number=ESP32-S3-MINI-1-N8, Pricing="1=5.28, 10=4.566, 25=4.3196, 100=3.9802, 250=3.7768 (USD)", RoHS=Compliant, Stock=1766, Supplier=DigiKey
U2: "IC USB SERIAL FULL UART 20QFN", Ambient Temperature Range High=85°C, Case/Package=QFN, Clock Frequency=12.02MHz, LCSC Part Number=C132159, Manufacturer=FTDI, Max Supply Current=8.4mA, Max Supply Voltage=5.5V, Min Operating Temperature=-40°C, Min Supply Voltage=2.97V, Operating Supply Current=8mA, Operating Supply Voltage=5V, Supplier Part Number=768-1128-6-ND, Category="Interface ICs", ComponentLink1Description=https://datasheet.octopart.com:443/FT231XQ-R-FTDI-datasheet-182343132.pdf?src-supplier=IHS, ComponentLink1URL=https://datasheet.octopart.com:443/FT231XQ-R-FTDI-datasheet-182343132.pdf?src-supplier=IHS, ComponentLink2Description=https://datasheet.octopart.com:443/FT231XQ-R-FTDI-datasheet-11021087.pdf?src-supplier=ODG+(Origin+Data+Global), ComponentLink2URL=https://datasheet.octopart.com:443/FT231XQ-R-FTDI-datasheet-11021087.pdf?src-supplier=ODG+(Origin+Data+Global), ComponentLink3Description=https://datasheet.octopart.com:443/FT231XQ-R-FTDI-datasheet-28834672.pdf?src-supplier=SOS+electronic, ComponentLink3URL=https://datasheet.octopart.com:443/FT231XQ-R-FTDI-datasheet-28834672.pdf?src-supplier=SOS+electronic, ComponentLink4Description=https://datasheet.octopart.com:443/FT231XQ-R-FTDI-datasheet-68321328.pdf?src-supplier=TME, ComponentLink4URL=https://datasheet.octopart.com:443/FT231XQ-R-FTDI-datasheet-68321328.pdf?src-supplier=TME, ComponentLink5Description=https://datasheet.octopart.com:443/FT231XQ-R-FTDI-datasheet-134530624.pdf?src-supplier=SHENGYU+ELECTRONICS, ComponentLink5URL=https://datasheet.octopart.com:443/FT231XQ-R-FTDI-datasheet-134530624.pdf?src-supplier=SHENGYU+ELECTRONICS, Data Rate=12Mbps, Height=800µm, Height - Seated (Max)=800µm, Interface="UART, USB", Lead Free="Lead Free", Length=4mm, Lifecycle Status=Production, Manufacturer Part Number=FT231XQ-R, Max Operating Temperature=85°C, Mounting Technology="Surface Mount", Number of Channels=1, Number of Terminals=20, Pins=20, Pricing="1=2.34, 25=2.27, 100=2.2, 250=2, 500=1.82002, 1000=1.7625 (USD)", REACH SVHC=Yes, RoHS=Compliant, Supplier=DigiKey, Terminal Pitch=500µm, Weight=123.008581mg, Width=4mm
U3: "IC REG LIN 3.3V 1.5A SOT-223-4", Case/Package=SOT-223, Dropout Voltage=340mV, Input Bias Current=1mA, LCSC Part Number=C181262, Manufacturer="Texas Instruments", Manufacturer Lifecycle Status=ACTIVE, Max Operating Temperature=125°C, Max Output current=1.5A, Max Output Voltage=3.3V, Max Supply Voltage=20V, Min Current Limit=1.6A, Min Input Voltage=2.1V, Min Operating Temperature=-40°C, Supplier Part Number=296-24897-1-ND, Accuracy=3%, Category="LDO Voltage Regulators", ComponentLink1Description=https://datasheet.octopart.com:443/TL1963A-33DCYR-Texas-Instruments-datasheet-36835243.pdf?src-supplier=Texas+Instruments, ComponentLink1URL=https://datasheet.octopart.com:443/TL1963A-33DCYR-Texas-Instruments-datasheet-36835243.pdf?src-supplier=Texas+Instruments, ComponentLink2Description=https://octopart.com:443/opatz8j6/c1?t=eQziYMWFb8zv3PFgQRFbMfTTvSDFJLTokMOI4F5orDeDoDa32ipqmmqH4GHcFL-Kg0x_OyDjISqc56Lvihmw7lDzHeOIK_c0Jl4lErHHLWhrt5UvN8oRfvWg0evw4KIIcaC_kn30e9oWvn9_ZC6H079vMgMof3vTPQ4xjcndsXhGl3M-Mjq-xx-9LJ4l6yCiGXvyk85tTFE3RnKUBQnQEg9NMXuoUmnrTC46M-2wX_MURvrEYq6-8Qr0GAoCehB6DeBborBFrhQE0Rtqc73-o7uRj0AqQ1aKwLra5ZT5liYc-nKqdJOxQr_Y0_TKT62MBW8MvwtmzsPellpAp432iLsIhs0bxq6X8sj8G4qv4vEHskNICVPCOduHbszHZZN2-_32Ox0&src-supplier=Texas+Instruments, ComponentLink2URL=https://octopart.com:443/opatz8j6/c1?t=eQziYMWFb8zv3PFgQRFbMfTTvSDFJLTokMOI4F5orDeDoDa32ipqmmqH4GHcFL-Kg0x_OyDjISqc56Lvihmw7lDzHeOIK_c0Jl4lErHHLWhrt5UvN8oRfvWg0evw4KIIcaC_kn30e9oWvn9_ZC6H079vMgMof3vTPQ4xjcndsXhGl3M-Mjq-xx-9LJ4l6yCiGXvyk85tTFE3RnKUBQnQEg9NMXuoUmnrTC46M-2wX_MURvrEYq6-8Qr0GAoCehB6DeBborBFrhQE0Rtqc73-o7uRj0AqQ1aKwLra5ZT5liYc-nKqdJOxQr_Y0_TKT62MBW8MvwtmzsPellpAp432iLsIhs0bxq6X8sj8G4qv4vEHskNICVPCOduHbszHZZN2-_32Ox0&src-supplier=Texas+Instruments, ComponentLink3Description=https://datasheet.octopart.com:443/TL1963A-33DCYR-Texas-Instruments-datasheet-10255270.pdf?src-supplier=Texas+Instruments, ComponentLink3URL=https://datasheet.octopart.com:443/TL1963A-33DCYR-Texas-Instruments-datasheet-10255270.pdf?src-supplier=Texas+Instruments, ComponentLink4Description=https://sigma.octopart.com:443/49253063/technical_drawing/Texas-Instruments-TL1963A-33DCYR.pdf?src-supplier=Texas+Instruments, ComponentLink4URL=https://sigma.octopart.com:443/49253063/technical_drawing/Texas-Instruments-TL1963A-33DCYR.pdf?src-supplier=Texas+Instruments, ComponentLink5Description=https://datasheet.octopart.com:443/TL1963A-33DCYR-Texas-Instruments-datasheet-159117591.pdf?src-supplier=Augswan, ComponentLink5URL=https://datasheet.octopart.com:443/TL1963A-33DCYR-Texas-Instruments-datasheet-159117591.pdf?src-supplier=Augswan, ComponentLink6Description=https://datasheet.octopart.com:443/TL1963A-33DCYR-Texas-Instruments-datasheet-21820479.pdf?src-supplier=Newark, ComponentLink6URL=https://datasheet.octopart.com:443/TL1963A-33DCYR-Texas-Instruments-datasheet-21820479.pdf?src-supplier=Newark, ComponentLink7Description=https://datasheet.octopart.com:443/TL1963A-33DCYR-Texas-Instruments-datasheet-16079880.pdf?src-supplier=Farnell, ComponentLink7URL=https://datasheet.octopart.com:443/TL1963A-33DCYR-Texas-Instruments-datasheet-16079880.pdf?src-supplier=Farnell, ComponentLink8Description=https://datasheet.octopart.com:443/TL1963A-33DCYR-Texas-Instruments-datasheet-14171511.pdf?src-supplier=iiiC, ComponentLink8URL=https://datasheet.octopart.com:443/TL1963A-33DCYR-Texas-Instruments-datasheet-14171511.pdf?src-supplier=iiiC, ComponentLink9Description=http://sigma.octopart.com:80/reach_statement/Texas-Instruments-company-64.pdf?src-supplier=Compliance+Statements, ComponentLink9URL=http://sigma.octopart.com:80/reach_statement/Texas-Instruments-company-64.pdf?src-supplier=Compliance+Statements, ComponentLink10Description=http://sigma.octopart.com:80/conflict_mineral_statement/Texas-Instruments-company-63.pdf?src-supplier=Compliance+Statements, ComponentLink10URL=http://sigma.octopart.com:80/conflict_mineral_statement/Texas-Instruments-company-63.pdf?src-supplier=Compliance+Statements, Contact Plating=Tin, Height=1.8mm, Lead Free="Lead Free", Length=6.5mm, Lifecycle Status=Production, Manufacturer Part Number=TL1963A-33DCYR, Min Output Voltage=3.3V, Nominal Output Voltage=3.3V, Number of Outputs=1, Number of Regulators=1, Output Current=1.5A, Output Type=Fixed, Output Voltage=3.3V, Pins=4, Polarity=Positive, Pricing="1=3.13, 10=2.344, 25=2.1476, 100=1.9323, 250=1.82956, 500=1.76766, 1000=1.71669 (USD)", Quiescent Current=1mA, Radiation Hardening=No, REACH SVHC=No, RoHS=Compliant, Schedule B="8542390000, 8542390000|8542390000|8542390000|8542390000|8542390000", Stock=4242, Supplier=DigiKey, Thickness=1.6mm, Width=3.5mm

## Via types
v1: diameter 27.56, hole 11.81, L1 to L4, tented both sides, 140 vias
v2: diameter 24, hole 12, L1 to L4, tented both sides, 19 vias

## Nets (pads, with @x,y where several pads share a name; then routed paths per layer and width w, separated by ;. In a path a pad name is that pad's centre, name@x,y a point inside that pad or via, vN(x,y) a via of type N, cw(c..) or ccw(c..) an arc to the next point about the centre after c; other vN are vias at no path point)
+3V3: C1.1 C2.1 C14.1 C15.1 J1.2 J2.1 J5.2 R2.1 R3.1 R4.2 R5.2 R20.2 U1.3 | length 559.9
  L1 w10: R3.1 v1(907,846)
  L1 w15: R2.1 765.25,475 775.25,465 v1(780,465) ; R4.2 1855,192.99 1863.78,201.78 v1(1863.78,248.78) ; v1(2385,870) 2387.4,867.6 2396.58,867.6 2422.8,841.38 C14.1 ; C15.1 2517.11,844.31 2517.11,863.71 v1(2535,881.6) ; J1.2 2607.8,892.2 C2.1 ; C1.1 2647.2,52.8 J2.1
  L1 w20: R5.2 1832.01,782.99 v1(1845,770)
+3V3_FTDI: C6.1 C8.1 R3.2 R8.1 U2.10 U2.20 | length 728.3
  L1 w10: R8.1 574.37,588.62 564.73,588.62 540,613.35 540,643 543.36,646.36 556.11,646.36 566.75,657 571.14,657 571.14,673.94 C8.1 584.02,686.81 584.02,691.36 623.28,730.63 U2.10 ; U2.20 816.19,809.37 819,812.19 ; v1@871.25,859 871.25,811.74 R3.2 R3.2@872.89,809.9 ; C6.1 C6.1@872.89,755.1
  L1 w15: 819,812.19 836.45,812.19 868.48,780.15 ; C6.1@872.89,755.1 R3.2@872.89,809.9
  L4 w30: v1(650,699) 735.19,699 861,824.81 861,848 868.22,855.22 v1@868.22,859
  other v1: 871,859
+3V3_REG: C12.1 C13.1 J5.1 U3.3 | length 308.9
  L1 w10.01: v1(485,150) 486.39,151.39 523.61,151.39 v1(525,152.78) ; v1@525,150 522.5,152.5 522.5,210.3 C13.1 C12.1 ; v1(575,152.78) C12.1 ; 589.04,198.76 583.18,204.61 583.18,205.99 576.38,212.8 C12.1 ; 589.72,199.45 U3.3
+5V: C7.1 C11.1 J1.22 J6.3 R1.1 U3.1 | length 1204.2
  L1 w15: J6.3 505.83,440 568.62,377.2 C11.1 571.67,378.88 655.3,378.88 U3.1 ; J1.22 550,936.74 577.2,909.54 C7.1 ; v1(656,502) 656,490.18 670,476.18 R1.1
  L4 w20: J6.3@443.55,440 594,440 v1(656,502)
  L4 w30: J6.3 429.91,441.91 443.55,441.91 554.57,552.94 554.57,886.06 544.76,895.87 544.76,944.76 J1.22
+5V_VBUS1: C3.1 D3.2 J3.A4B9 J3.B4A9 J6.1 R10.2 | length 1405.8
  L1 w12: D3.2 422.19,631 C3.1
  L1 w15: R10.2 892.01,654.59 895.14,651.46 925.14,651.46 930.6,646 v1(934,646)
  L1 w20: J3.A4B9 245.83,862.76 220.25,862.76 196.97,839.48 196.97,700.68 220.25,677.4 245.83,677.4 J3.B4A9 377.6,675.59 422.19,631 423,630.19 J6.1@423,540 ; J6.1 554.27,540 663.05,431.22 844.73,431.22 962.78,549.27 962.78,581.99 935.45,609.33 935.45,644.55 v1(934,646)
+5V_VBUS2: C10.1 D6.2 J4.A4B9 J4.B4A9 J6.2 | length 737.6
  L1 w12: J4.B4A9 241.83,181.4 208.6,181.4 190,200 190,345 209.57,364.57 J4.A4B9 304.91,364.57 317.29,352.19 385.67,352.19 413.48,380 ; D6.2 413.48,380 ; J6.2@432.78,485.22 J6.2 427.09,490 392,454.91 392,425.09 413.09,404 452.97,404 465.59,391.38 C10.1 465.59,388.62 456.97,380 413.48,380
+VCC_FTDI: C4.1 C5.1 R1.2 R2.2 U2.12 | length 243.3
  L1 w10.01: 690,665 690.31,665.31 U2.12
  L1 w15: 690,665 690,645 690,638.18 680,628.18 680,597.2 681.52,595.69 698.48,595.69 702.8,591.38 C5.1 C4.1 702.89,529.9 702.89,475.1 R2.2
BTN_GPIO0: C17.1 Q2.3 R19.1 SW2.1 SW2.2 | length 961.6
  L1 w10: Q2.3 1117.42,751.08 1207.09,661.42 SW2.2 SW2.1 1635.47,661.42 1659.45,685.39 1678.19,685.39 C17.1 1807.91,692.2 1885.7,770 R19.1
CHIP_PU: C16.2 J2.3 Q1.3 R20.1 SW1.1 SW1.2 U1.45 | length 2598.5
  L1 w10: Q1.3 1117.42,251.08 1203.49,251.08 SW1.2 1336.39,237.83 1350.73,223.49 1437.53,223.49 1451.87,237.83 SW1.1 1656.22,237.83 1671.85,222.2 C16.2 R20.1 1764.98,290 v1(1768,286.98) ; J2.3 2480,80 2501.57,80 2594.76,173.19 2616.77,173.19 2629.29,185.71 U1.45
  L4 w10: v1(1768,286.98) 1866.29,286.98 1882.31,270.96 1958.04,270.96 2044.63,357.56 2515.07,357.56 2590.93,281.7 2590.93,190.93 J2.3
CON2_USB_N: D7.2 J4.A7 J4.B7 R23.1 | length 2143.7
  L1 w6.03: J4.A7 244.75,263.13 223.14,263.13 215.99,270.28 215.99,289.56 223.14,296.72 244.75,296.72 J4.B7 291.07,299.61 323.27,267.41 D7.2 356.92,267.41 362.97,261.36 402.87,261.36 408.67,255.56 430.7,255.56 442.14,267 v1(445,267) ; v2(1277.56,447.05) 1299.35,468.84 1488.86,468.84 1497.87,477.85 1497.87,592.12 1509.68,603.92 1665.41,603.92 1776.46,492.87 1851.03,492.87 1854.56,496.4 1854.56,508.19 R23.1
  L4 w6.03: v1(445,267) 447.86,267 459.3,255.56 530.44,255.56 631.85,154.15 842.03,154.15 842.13,154.04 906.23,218.15 1126.09,218.15 1286.48,378.54 1286.48,434.53 1277.56,443.46 v2(1277.56,447.05)
CON2_USB_P: D8.2 J4.A6 J4.B6 R24.1 | length 2102.8
  L1 w6.03: J4.B6 248.16,241.07 288,241.07 ; J4.A6 285.08,279.92 289,276 289,242.07 288,241.07 ; v1(445,230) 442.14,230 430.7,241.44 402.81,241.44 397.02,247.23 361.56,247.23 355.92,241.59 D8.2 350.48,241.07 288,241.07 ; v2(1309.54,445.83) 1313.17,445.83 1322.05,454.71 1494.71,454.71 1512,472 1512,586.26 1515.53,589.79 1659.55,589.79 1770.61,478.74 1851.03,478.74 1854.56,475.21 1854.56,463.42 R24.1
  L4 w6.03: v1(445,230) 447.86,230 459.3,241.44 524.58,241.44 626,140.01 848.08,140.01 912.08,204.01 1131.95,204.01 1300.61,372.68 1300.61,433.31 1309.54,442.23 v2(1309.54,445.83)
CON_ESP_USB_N: J2.21 R25.1 | length 1909.2
  L1 w6.03: J2.21 689.4,50 692.94,53.53 692.94,70.96 743.68,121.71 1312.26,121.71 1356.44,165.89 1356.44,176.48 1347,185.92 v2(1347,189) ; R25.1 1931.02,515 v1@1960,515
  L4 w6.03: v2@1345.62,187.62 1380.42,152.83 1397.12,152.83 1424.24,179.94 1424.24,289.6 1466.45,331.82 1493.82,331.82 1502.36,340.36 1988.41,340.36 2068.95,420.91 2068.95,472.31 2036.86,504.4 2008.58,504.4 2000.91,496.73 1995.92,496.73 1990.83,501.82 1989,501.82 1975.83,515 v1(1970,515)
CON_ESP_USB_P: J2.20 R26.1 | length 1890.4
  L1 w6.03: J2.20 710.6,50 707.06,53.53 707.06,65.11 749.53,107.58 1318.11,107.58 1370.56,160.03 1370.56,175.48 1380,184.92 v2(1380,188) ; R26.1 1931.4,457 v1(2032,457)
  L4 w6.03: v2(1380,188) 1381.46,186.54 1381.46,171.76 1386.27,166.96 1391.27,166.96 1410.11,185.79 1410.11,295.46 1460.6,345.95 1487.97,345.95 1496.51,354.49 1982.55,354.49 2054.82,426.76 2054.82,466.45 2031.01,490.27 2014.44,490.27 2010.9,486.74 2010.9,481.75 2032,460.65 v1(2032,457)
CON_GPIO0: J1.3 R17.1 | length 566.5
  L1 w10: R17.1 1948.62,825.63 1948.62,835.27 1975.94,862.59 2190.87,862.59 2227.06,898.78 2398.78,898.78 J1.3
CON_USB_N: D4.2 J3.A7 J3.B7 R6.1 | length 495.7
  L1 w6.03: J3.A7 293.84,760.24 297.37,763.77 297.37,799.61 ; J3.B7 297.37,799.61 ; v1(392,797) 392,800.13 364.92,827.2 D4.2 324.97,827.2 297.37,799.61 ; v2(501,749) 504.58,749 513.52,757.94 531.84,757.94 535.38,754.4 535.38,747.61 R6.1
  L4 w6.03: v1(392,797) 392,797.5 378.06,811.44 378.06,818.13 381.6,821.66 407.72,821.66 471.45,757.94 488.48,757.94 497.42,749 v2(501,749)
CON_USB_P: D5.2 J3.A6 J3.B6 R7.1 | length 511
  L1 w6.03: J3.A6 244.75,777.03 223.14,777.03 215.99,769.88 215.99,750.6 223.14,743.44 244.75,743.44 J3.B6 300.05,740.55 322.29,762.8 D5.2@355.08,762.8 ; v1(350,798) 351.2,796.8 351.2,766.67 D5.2@355.08,762.8 ; D5.2 D5.2@355.08,762.8 ; v2(501,781) 504.58,781 513.52,772.06 531.84,772.06 535.38,775.6 535.38,782.39 R7.1
  L4 w6.03: v1(350,798) 350.5,798 363.94,811.44 363.94,823.98 375.74,835.79 413.57,835.79 477.3,772.06 488.48,772.06 497.42,781 v2(501,781)
DTR_FTDI: Q2.2 R16.2 U2.18 | length 388.8
  L1 w10: U2.18 785.64,769.77 802.96,769.77 828.94,743.79 828.94,726.08 853.17,701.86 938.97,701.86 968.82,672.01 971.18,672.01 976.1,676.93 976.1,697.64 990.78,712.31 990.78,761.74 996.64,767.6 Q2.2
ESP_USB_N: R23.2 R25.2 U1.23 | length 252.3
  L1 w6.03: R23.2 1903.81,508.19 1903.81,496.4 1907.34,492.87 1957.06,492.87 1959.94,490 1982,490 1996,504 2063.38,504 ccw(c2069,528.15) 2066.04,503.53 2071.47,498.1 2079.57,490 U1.23
ESP_USB_P: R24.2 R26.2 U1.24 | length 266.1
  L1 w6.03: R26.2 1903.81,463.42 1903.81,472.44 1910.21,478.84 1951.25,478.84 1958.98,471.11 1995.03,471.11 2013.34,489.41 2048.83,489.41 2067.13,471.11 2103.18,471.11 2106.72,467.58 2106.72,461.39 2111.57,456.54 U1.24
FTDI_USB_N: R6.2 U2.9 | length 69.2
  L1 w6.03: R6.2 584.62,747.61 584.62,752.34 588.16,755.87 610,755.87 616.74,755.87 622.29,750.31 U2.9
FTDI_USB_P: R7.2 U2.8 | length 71.2
  L1 w6.03: R7.2 584.62,782.39 584.62,773.43 588.16,769.9 610,769.9 634.49,769.9 U2.8
GND: C1.2 C2.2 C3.2 C4.2 C5.2 C6.2 C7.2 C8.2 C9.2 C10.2 C11.2 C12.2 C13.2 C14.2 C15.2 C16.1 C17.2 D1.1 D3.1 D4.1 D5.1 D6.1 D7.1 D8.1 J1.1 J1.23 J2.2 J2.24 J3.A1B12 J3.B1A12 J3.S1 J3.S2 J3.S3 J3.S4 J4.A1B12 J4.B1A12 J4.S1 J4.S2 J4.S3 J4.S4 R9.1 R11.2 R12.2 R13.1 R14.2 R15.2 SW1.3 SW1.4 SW2.3 SW2.4 U1.1 U1.2 U1.42 U1.43 U1.46 U1.47 U1.48 U1.49 U1.50 U1.51 U1.52 U1.53 U1.54 U1.55 U1.56 U1.57 U1.58 U1.59 U1.60 U1.61 U1.62 U1.63 U1.64 U1.65 U1.66 U1.67 U1.68 U1.69 U1.70 U1.71 U1.72 U1.73 U2.3 U2.13 U2.21 U3.2 U3.4 | length 4072.1
  L1 w10: D8.1 352.5,214.5 395.5,214.5 v1(397,213) ; D7.1 401,293 v1(402,292) ; D5.1 383.8,737.2 v1(387,734) ; D4.1 364.92,852.8 385.13,873 v1(392,873) ; v1(414,765) 418.75,765 426.74,757.01 R12.2 ; R14.2 439.65,304.64 462.64,304.64 v1(466,308) ; R11.2 455.63,817.36 473.64,817.36 v1(477,814) ; v1(515.8,869.99) 519.16,866.63 537.17,866.63 C7.2
  L1 w10.01: v1(500,300) v1(545,300) ; C13.2 521.38,247.2 528.18,254.01 528.18,255.39 544,271.21 544,299 v1(545,300) ; C11.2 571.38,342.8 578.18,335.99 578.18,334.61 586.64,326.15 586.64,303.36 v1(590,300) ; C12.2 576.38,247.2 583.18,254.01 583.18,255.39 590,262.2 v1(590,300) ; v1(635,545) C9.2 ; U3.2 604.75,290 594.75,300 v1(590,300) ; 684.05,880.91 704.14,880.91 710,875.05 U2.3 ; U2.13 710.23,694.35 710.23,670.95 730,651.19 v1(730,650) ; v1(1204,342) 1204,346.75 1220.87,363.61 SW1.4@1220.87,424.13 ; v1(1575,313) SW1.3 ; v1(545,300) v1(590,300)
  L1 w12: D6.1 344.41,417.2 v1(357.2,430) ; v1(358,597) D3.1 ; v1(493,590) 494.1,591.1 494.1,629.9 C3.2
  L1 w15: J4.A1B12 258.46,396.06 305,442.6 v1(305,450) ; R15.2 432.01,135 v1(447.01,120) ; C10.2 500.08,389.92 500.08,346.3 v1(500.16,346.21) ; v1(508,686) 514,680 C8.2 ; C4.2 770,530 v1(775,525) ; C5.2 770,590 v1(775,585) ; R13.1 892.01,603.82 927.83,568 v1(929,568) ; C6.2 907.2,756.38 911.52,760.69 931.08,760.69 934.83,764.44 v1(938.23,764.44) ; SW2.4@1240.45,819 SW2.4 1290.42,838.58 v1(1319,810) ; SW2.3 1581.94,838.58 1602,818.52 v1(1602,793) ; C17.2@1684,656.8 C17.2 1686.38,657.8 1707.17,637 v1(1710,637) ; C14.2 2461.52,844.31 2461.52,866.52 v1(2475,880) ; U1.42 v1@2528.9,269.57 ; C15.2 2547.2,838.62 v1(2577.91,807.91) 2628.31,807.91 2629.29,806.93 ; J2.2 2612.8,112.8 C1.2 ; U1.43 v1@2562.36,269.57 ; v1@2595.83,710.43 U1.2 ; v1@2615.47,322.68 U1.48 ; v1@2615.47,356.14 U1.49 ; v1@2615.47,389.61 U1.50 ; v1@2615.47,423.07 U1.51 ; v1@2615.47,456.54 U1.52 ; v1@2615.47,490 U1.53 ; v1@2615.47,523.46 U1.54 ; v1@2615.47,556.93 U1.55 ; v1@2615.47,590.39 U1.56 ; v1@2615.47,623.86 U1.57 ; v1@2615.47,657.32 U1.58 ; v1(2619.19,289.81) 2619.48,289.51 2670.33,289.51 U1.47 ; v1(2619.78,255.53) 2619.89,255.64 2670.52,255.64 U1.46 ; U1.1 2629.29,806.93 ; v1(2630,690) 2630.39,690.39 2670.24,690.39 U1.59 ; v1(2630,725) 2630.37,724.63 2670.26,724.63 U1.60 ; C2.2 2642.2,841.38 2650,849.17 J1.1 ; U1.62 2629.29,806.93
  L1 w20: J4.B1A12 309.09,144.09 v1(310,145) ; J3.B1A12 281.91,644.09 291.02,634.98 291.02,612.98 v1(294,610) ; J3.A1B12 302.94,896.06 v1(303,896) ; U3.4 903.03,318.54 958.55,374.07 958.55,383.55 v1(960,385) ; v1(1675.69,167.71) 1675.69,169.75 1686.47,180.53 C16.1@1686.47,185.64 ; v1(1768.78,202.52) D1.1 ; v1(2060,750) 2062.05,750 2073.7,761.66 2115.51,761.66 U1.63 ; v2(2070.84,204.16) 2070.84,205.24 2079.41,213.81 2079.41,214.41 U1.64 ; v2(2275.04,554.96) v2(2275.04,554.96) U1.72 ; v2(2275.04,425.04) U1.61 ; v2(2275.04,490) U1.73 ; v2(2395.04,392) U1.71 ; U1.69 v2(2395.04,599.22) ; U1.68 v2(2515.04,425.04) ; U1.67 v2(2515.04,490) ; U1.66 v2(2515.04,554.96) ; U1.65 2665,208.78 2665,185 v1(2680,170)
  other v1: 1384,126 1309,160 2528.68,269.78 2562.15,269.78 2615.26,322.46 2615.26,355.93 1000,385 1040,385 1080,385 2615.26,389.39 2159,390 2615.26,422.85 960,430 1000,430 1040,430 1080,430 2615.26,456.32 960,475 1000,475 1040,475 1080,475 2159,489 2615.26,489.78 1804,518 2615.26,523.25 2615.26,556.71 2615.26,590.18 2160,592 2615.26,623.64 2615.26,657.11 2596.04,710.22 694,749 736,749 693,788 735,789 670,885
  other v2: 2429,457 2362,458 2363,523 2428,523
GPIO0: R17.2 R19.2 U1.4 | length 641.9
  L1 w10: R19.2 1977.01,818.82 R17.2 2398.31,820 2406.5,811.81 2512.45,811.81 2518.31,805.95 2518.31,784.06 2528.9,773.46 U1.4